# Altium PCB mini驱动V2.PcbDoc
Units mil, origin at the board's own origin, x right, y up, seen from the top; angles counter-clockwise.
Board outline 1710 x 820 mil, 2 copper layers (Top Layer, Bottom Layer); 37 components, 33 nets, 178 pads, 25 vias.
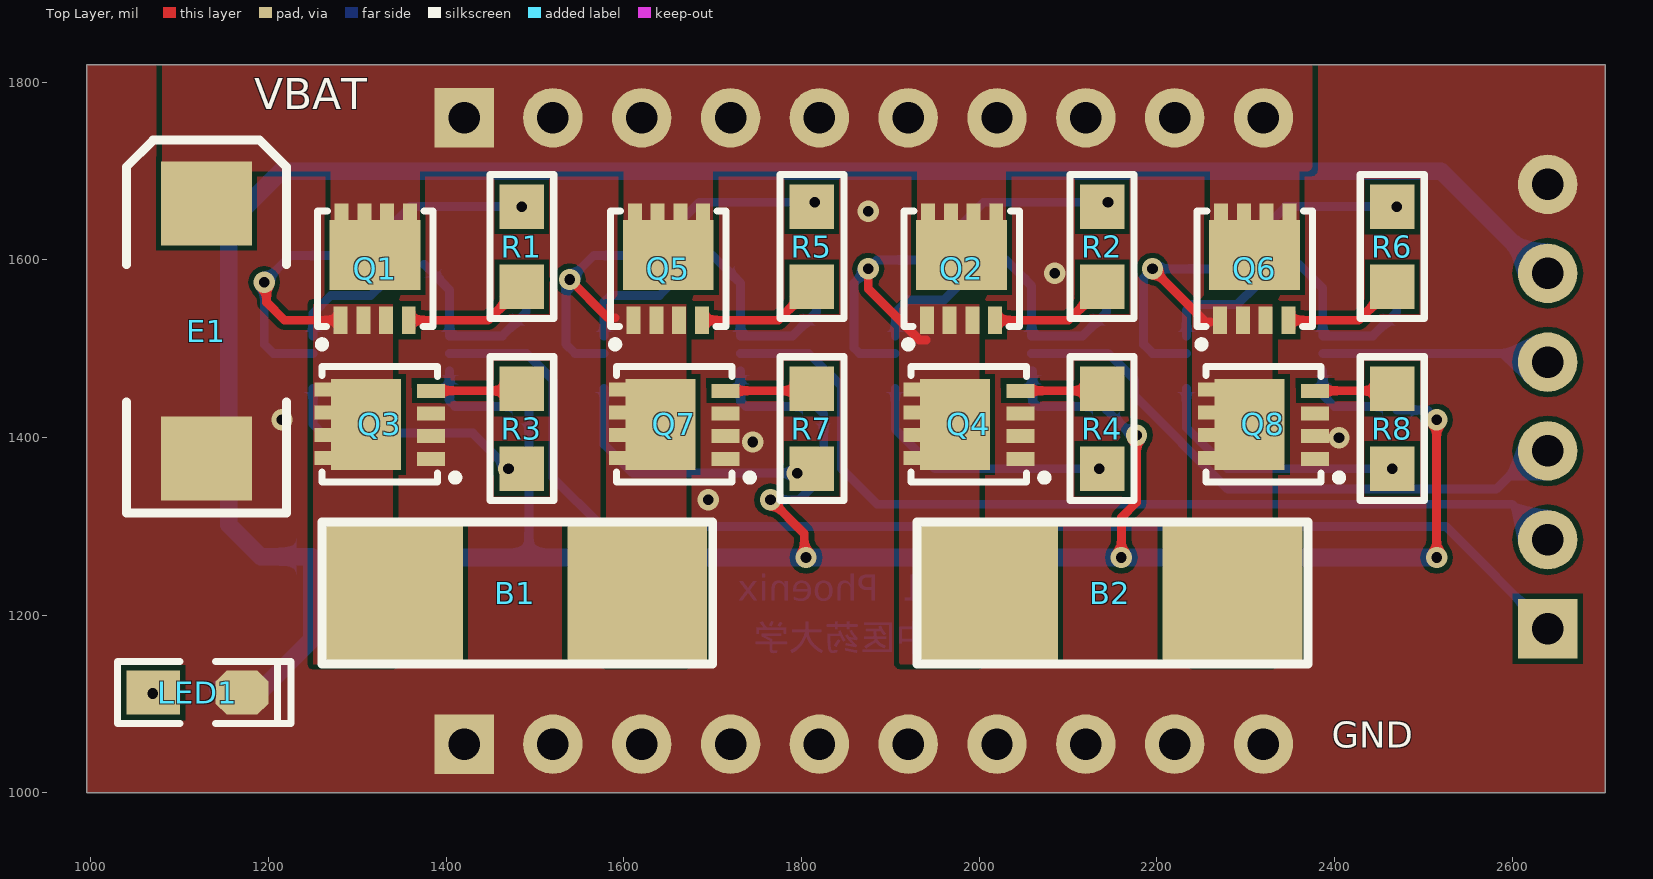
[diagram p0: Top Layer view]
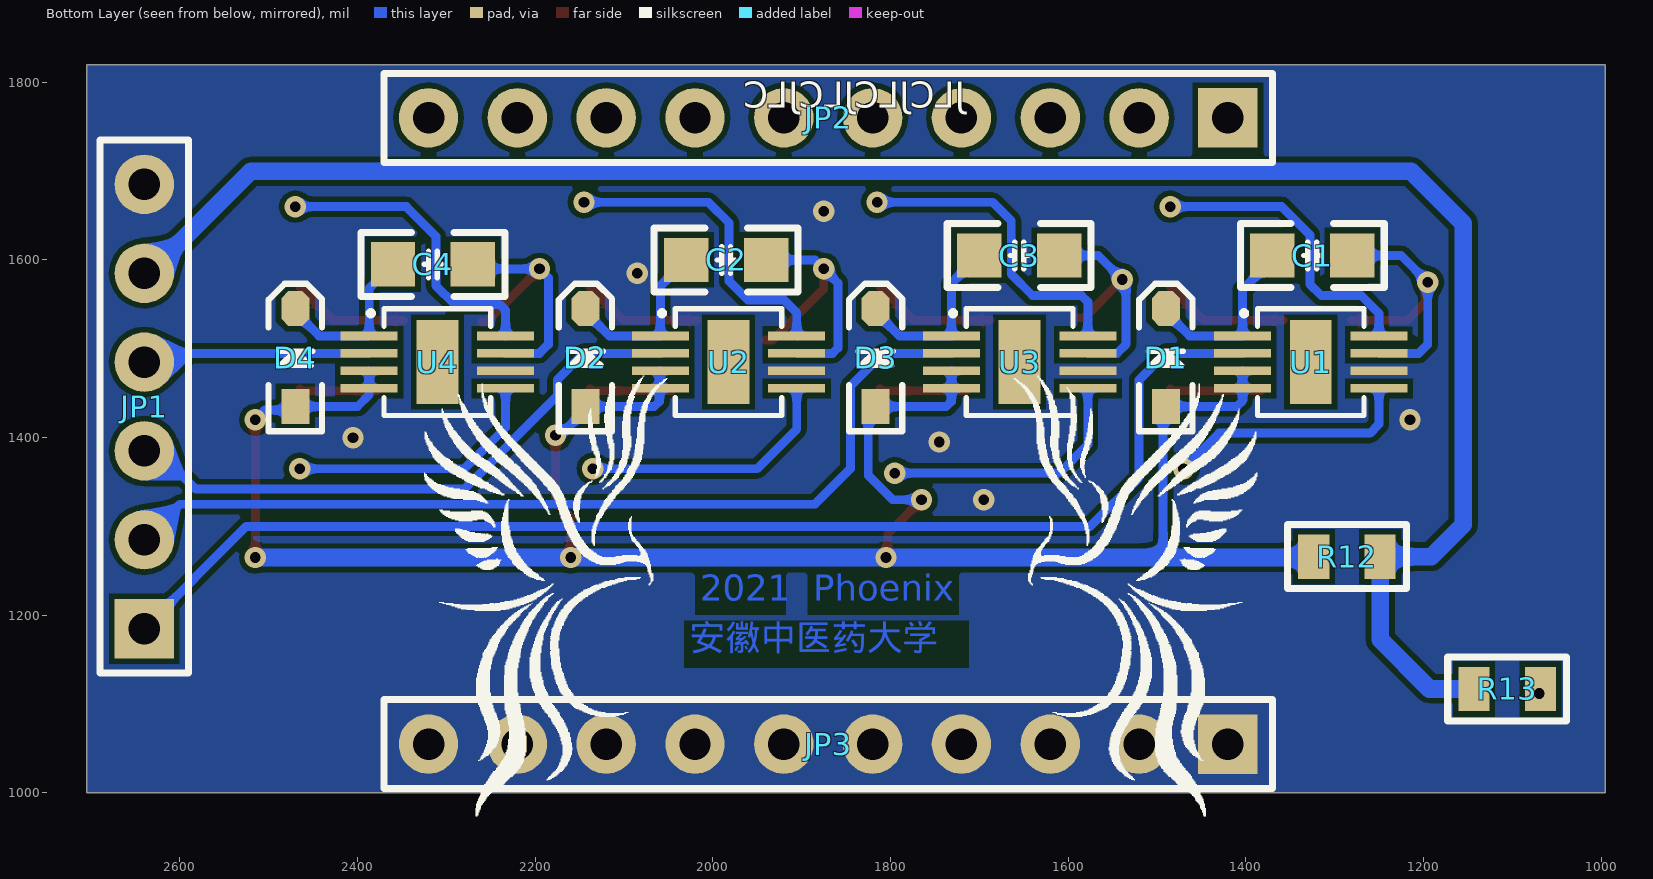
[diagram p1: Bottom Layer view, seen from below]

## Layer stack, top to bottom
Top Solder: solder mask 0.4, Solder Resist, Dk 3.5
Top Layer: signal copper 1.4
Dielectric 1: dielectric 12.6, FR-4, Dk 4.8
Bottom Layer: signal copper 1.4
Bottom Solder: solder mask 0.4, Solder Resist, Dk 3.5

## Board outline
995,1000 2705,1000 2705,1820 995,1820

## Design rules (kind name [scope] priority, off if disabled: settings)
Clearance [All] p1: gap=6 ignorepadtopadclearanceinfootprint=FALSE
HoleSize [All] p1: absolutevalues=TRUE maxlimit=1000 minlimit=1 maxpercent=80.000 minpercent=20.000
MinimumSolderMaskSliver [All] p1: minsoldermaskwidth=0
PlaneConnect [All] p1: planeconnectstyle=Direct reliefexpansion=20 reliefentries=4 reliefconductorwidth=10 reliefairgap=10
PolygonConnect [All] p1: connectstyle=Direct reliefconductorwidth=10 reliefentries=4 polygonreliefangle="90 Angle" airgapwidth=10
RoutingVias [All] p1: holewidth=12 width=24 viastyle="Through Hole" minholewidth=12 minwidth=24 maxholewidth=60 maxwidth=120
SilkToSilkClearance [All] p1: silktosilkclearance=0
SilkToSolderMaskClearance [IsPad] p1: minsilkscreentomaskgap=0 clearancetoexposedcopper=TRUE
SolderMaskExpansion [All] p1: expansion=4
Width [All] p1: maxlimit=500 minlimit=6 preferedwidth=6
25 further rules are at their usual default settings.

## Components (designator, comment, footprint, x,y, rotation, side; value= is the part's Value field where it differs from the comment)
B1 "Motor" 电机 1480,1225 r90 top
B2 "Motor" 电机 2150,1225 r90 top
C1 "1uF" "C 0805_M" 1325,1605 r0 bottom
C2 "1uF" "C 0805_M" 1985,1600 r0 bottom
C3 "1uF" "C 0805_M" 1655,1605 r0 bottom
C4 "1uF" "C 0805_M" 2315,1595 r0 bottom
D1 "B5919WS" SOD-323 1490,1490.12 r90 bottom
D2 "B5919WS" SOD-323 2143.33,1490.12 r90 bottom
D3 "B5919WS" SOD-323 1816.67,1490.12 r90 bottom
D4 "B5919WS" SOD-323 2470,1490.12 r90 bottom
E1 "220uF" "CD D(7343)" 1130,1520 r270 top
JP1 "HDR-1X6" HDR2.54-LI-6P 2640,1435 r90 bottom
JP2 "HDR-1X10" HDR2.54-LI-10P 1870,1760 r0 bottom
JP3 "HDR-1X10" HDR2.54-LI-10P 1870,1055 r0 bottom
LED1 "红色" "LED 0805G" 1120,1113 r0 top
Q1 "AON7418" AON7418 1320,1590 r0 top
Q2 "AON7418" AON7418 1980.12,1590 r0 top
Q3 "AON7418" AON7418 1325,1415 r90 top
Q4 "AON7418" AON7418 1988.33,1415 r90 top
Q5 "AON7418" AON7418 1650.06,1590 r0 top
Q6 "AON7418" AON7418 2310.18,1590 r0 top
Q7 "AON7418" AON7418 1656.67,1415 r90 top
Q8 "AON7418" AON7418 2320,1415 r90 top
R1 "10R" "R 0805_M" 1485,1615 r90 top
R2 "10R" "R 0805_M" 2138.33,1615 r90 top
R3 "10R" "R 0805_M" 1485,1410 r270 top
R4 "10R" "R 0805_M" 2138.33,1410 r270 top
R5 "10R" "R 0805_M" 1811.67,1615 r90 top
R6 "10R" "R 0805_M" 2465,1615 r90 top
R7 "10R" "R 0805_M" 1811.67,1410 r270 top
R8 "10R" "R 0805_M" 2465,1410 r270 top
R12 "0R" "R 0805_L" 1286,1266 r0 bottom
R13 "10K" "R 0805_L" 1105.6,1117 r180 bottom
U1 "FD2204D" FD2204D 1326.77,1485 r270 bottom
U2 "FD2204D" FD2204D 1982.26,1485 r270 bottom
U3 "FD2204D" FD2204D 1654.51,1485 r270 bottom
U4 "FD2204D" FD2204D 2310,1485 r270 bottom

## Footprints (in the part's own frame and the unit in brackets; to place one, negate y for a bottom-side part, rotate by r counter-clockwise, add the part's x,y. Pads: shape width x height; smd on the part's side, far side on the other; paste and mask are expansions set on the pad)
AON7418 [mil]
  rect 15.74x31.5 smd: 1(-39.04,-57.87) 2(-13.45,-57.87) 3(12.14,-57.87) 4(37.73,-57.87) 5(39.04,57.87) 6(13.44,57.87) 7(-12.16,57.87) 8(-37.76,57.87)
  rect 102.36x78.74 smd: 9(-0.18,15.49)
  silkscreen extent -65,-89 65,65, body extent -65,-65 65,65, height 24
"C 0805_M" [mil] "无极性贴片电容                                         淘宝ID:黄晶宝石"
  rect 50x50 smd: 1(-45,0) 2(45,0)
  silkscreen extent -81,-36 81,36, body extent -39,-24 39,24, height 20
"CD D(7343)" [mm] "长7.3mm，宽4.3mm，厚2.8mm      淘宝ID:黄晶宝石"
  rect 2.4x2.6 smd: 1(-3.65,0) 2(3.65,0)
  silkscreen extent -5.46,-2.29 5.21,2.29, body extent -3.65,-2.15 3.65,2.15, height 2.8
FD2204D [mm]
  rect 0.25x1.63 smd: 1(-0.75,-1.95) 2(-0.25,-1.95) 3(0.25,-1.95) 4(0.75,-1.95) 5(0.75,1.95) 6(0.25,1.95) 7(-0.25,1.95) 8(-0.75,1.95)
  rect 2.4x1.2 smd: 9(0,0)
  silkscreen extent -1.52,-1.98 1.52,1.52, body extent -1.52,-1.52 1.52,1.52, height 0.25
HDR2.54-LI-6P [mm] "排针，6脚"
  rect 1.7x1.7 hole 0.9: 1(-6.35,0)
  round 1.7 hole 0.9: 2(-3.81,0) 3(-1.27,0) 4(1.27,0) 5(3.81,0) 6(6.35,0)
  silkscreen extent -7.62,-1.27 7.62,1.27, body extent -7.62,-1.27 7.62,1.27, height 8.5
HDR2.54-LI-10P [mm] "排针，10脚   淘宝ID:黄晶宝石   店铺网址:https://shop463601444.taobao.com"
  rect 1.7x1.7 hole 0.9: 1(-11.43,0)
  round 1.7 hole 0.9: 2(-8.89,0) 3(-6.35,0) 4(-3.81,0) 5(-1.27,0) 6(1.27,0) 7(3.81,0) 8(6.35,0) 9(8.89,0) 10(11.43,0)
  silkscreen extent -12.7,-1.27 12.7,1.27, body extent -12.7,-1.27 12.7,1.27, height 8.5
"LED 0805G" [mil] "绿色0805LED                              淘宝ID:黄晶宝石"
  rect 60x50 smd: 1(-50,0)
  oct 60x50 smd: 2(50,0)
  silkscreen extent -90,-35 105,35, body extent -39,-25 39,25, height 32
"R 0805_L" [mil] "1/8W贴片电阻"
  rect 35x50 smd: 1(-37.4,0) 2(37.4,0)
  silkscreen extent -67,-36 67,36, body extent -39,-25 39,25, height 20
"R 0805_M" [mil] "1/8W贴片电阻"
  rect 50x50 smd: 1(-45,0) 2(45,0)
  silkscreen extent -81,-36 81,36, body extent -39,-25 39,25, height 20
SOD-323 [mm] "1.8x1.3X0.9mm（长宽高，不包括引脚）"
  rect 1x0.8 smd: 1(-1.4,0)
  oct 1x0.8 smd: 2(1.4,0)
  silkscreen extent -2.11,-0.76 2.11,0.76, body extent -1.34,-0.63 1.31,0.67, height 1
电机 [mm]
  rect 4x4 smd paste+0 mask+0.051: 1(0,-3.429) 2(0,3.556)
  silkscreen extent -2.03,-5.59 2.03,5.59

## Part data
B1 B2: library part "Motor Servo", "Servo Motor"
C1 C2 C3 C4: library part C, "贴片电容"
D1 D2 D3 D4: library part 1N5819, "肖特基二极管"
E1: library part CT, "贴片钽电容"
JP1: library part "Header 6", "6P接插件"
JP2 JP3: library part "Header 10", "10P接插件"
LED1: library part LED-SMD, "贴片LED"
R1 R2 R3 R4 R5 R6 R7 R8 R12 R13: library part RES
  R1 R2 R3 R4 R5 R6 R7 R8 R13: =0R

## Via types
v1: diameter 24, hole 12, Top Layer to Bottom Layer, tented both sides, 25 vias

## Nets (pads, with @x,y where several pads share a name; then routed paths per layer and width w, separated by ;. In a path a pad name is that pad's centre, name@x,y a point inside that pad or via, vN(x,y) a via of type N, cw(c..) or ccw(c..) an arc to the next point about the centre after c; other vN are vias at no path point)
5V: JP1.5 R12.1 R13.1 | length 2226.6
  Bottom Layer w20: R13.1 1193,1117 1248.6,1172.6 R12.1 1191,1266 1155,1302 1155,1641 1214,1700 2520,1700 2635,1585 JP1.5
IC: D1.1 D2.1 D3.1 D4.1 R12.2 U1.3 U1.4 U2.3 U2.4 U3.3 U3.4 U4.3 U4.4 | length 2473.4
  Top Layer w10: v1(1765,1330) 1803,1292 1803,1267 v1(1805,1265) ; v1(2160,1265) 2160,1310 2177.02,1327.02 v1(2177.02,1402.68) ; v1(2515,1265) v1(2515,1420)
  Bottom Layer w10: U1.3 U1.4 1403.54,1441.46 1410,1435 D1.1 1493,1432 1493,1265 ; U3.3 U3.4 1731.29,1440.86 1737.14,1435 D3.1 1825,1426.67 1825,1357.47 1797.53,1330 v1(1765,1330) ; U2.3 2059.92,1475.16 2060,1475.08 2060,1440.86 2065.86,1435 D2.1 2143.33,1431.06 2171.72,1402.68 v1(2177.02,1402.68) ; U4.3 U4.4 2386.77,1448.23 2400,1435 D4.1 2470,1431.06 2503.94,1431.06 v1(2515,1420)
  Bottom Layer w20: R12.2@1331,1265 1493,1265 v1(1805,1265) v1(2160,1265) v1(2515,1265)
Motor_In1: JP1.1 U1.2 | length 1429.2
  Bottom Layer w10: U1.2 1490.16,1494.84 1520,1465 1520,1355 1575,1300 2525,1300 JP1.1
Motor_In2: JP1.2 U3.2 | length 1049.9
  Bottom Layer w10: U3.2 1807.82,1494.84 1845,1457.66 1845,1365 1885,1325 2600,1325 JP1.2
Motor_In3: JP1.3 U2.2 | length 672.6
  Bottom Layer w10: U2.2 2145.16,1494.84 2175,1465 2175,1446.99 2279.99,1342 2582,1342 2625,1385 JP1.3
Motor_In4: JP1.4 U4.2 | length 257.3
  Bottom Layer w10: U4.2 2386.85,1494.76 2630.24,1494.76 JP1.4
NetB1_1: B1.1 C3.1 Q5.1 Q5.2 Q5.3 Q7.5 Q7.6 Q7.7 Q7.8 Q7.9 U3.7 | length 273.1
  Top Layer w10: v1(1539,1578) 1582,1535 1590,1535
  Bottom Layer w10: U3.7 1544.87,1494.84 1534.66,1505.05 1534.66,1573.66 v1(1539,1578) 1566,1605 C3.1
NetB1_2: B1.2 C1.1 Q1.1 Q1.2 Q1.3 Q3.5 Q3.6 Q3.7 Q3.8 Q3.9 U1.7 | length 342.1
  Top Layer w10: v1(1195,1575) 1197.68,1572.32 1197.68,1552.32 1217.87,1532.13 Q1.1
  Bottom Layer w10: U1.7 1205.16,1494.84 1195,1505 v1(1195,1575) 1225,1605 C1.1
NetB2_1: B2.1 C4.1 Q6.1 Q6.2 Q6.3 Q8.5 Q8.6 Q8.7 Q8.8 Q8.9 U4.7 | length 308.5
  Top Layer w10: v1(2195,1590) 2255,1530 2260,1530
  Bottom Layer w10: U4.7 2195.16,1494.84 2185,1505 2185,1580 v1(2195,1590) 2265,1590 C4.1
NetB2_2: B2.2 C2.1 Q2.1 Q2.2 Q2.3 Q4.5 Q4.6 Q4.7 Q4.8 Q4.9 U2.7 | length 325.1
  Top Layer w10: v1(1875,1590) 1875,1567.52 1932.52,1510 1940,1510
  Bottom Layer w10: U2.7 1865.16,1494.84 1859,1501 1859,1574 v1(1875,1590) 1885,1600 C2.1
NetC1_2: C1.2 D1.2 U1.1 | length 193.8
  Bottom Layer w10: C1.2@1375,1595 1403.54,1566.46 U1.1 1463.23,1514.53 1490,1541.3 D1.2
NetC2_2: C2.2 D2.2 U2.1 | length 196.8
  Bottom Layer w10: C2.2 2059.03,1570.97 U2.1 2116.56,1514.53 2143.33,1541.3 D2.2
NetC3_2: C3.2 D3.2 U3.1 | length 203.8
  Bottom Layer w10: C3.2 1731.29,1573.71 U3.1 1789.9,1514.53 1816.67,1541.3 D3.2
NetC4_2: C4.2 D4.2 U4.1 | length 189.8
  Bottom Layer w10: C4.2 2386.77,1568.23 U4.1 2443.23,1514.53 2470,1541.3 D4.2
NetLED1_1: LED1.1 R13.2
  other v1: 1069.6,1112
NetQ1_4: Q1.4 R1.1 | length 143
  Top Layer w10: Q1.4 1447.13,1532.13 R1.1
NetQ2_4: Q2.4 R2.1 | length 136.2
  Top Layer w10: Q2.4 2100.46,1532.13 R2.1
NetQ3_4: Q3.4 R3.1 | length 103.1
  Top Layer w10: Q3.4 1482.73,1452.73 R3.1
NetQ4_4: Q4.4 R4.1 | length 93.1
  Top Layer w10: Q4.4 2136.06,1452.73 R4.1
NetQ5_4: Q5.4 R5.1 | length 139.6
  Top Layer w10: Q5.4 1773.8,1532.13 R5.1
NetQ6_4: Q6.4 R6.1 | length 132.8
  Top Layer w10: Q6.4 2427.13,1532.13 R6.1
NetQ7_4: Q7.4 R7.1 | length 98.1
  Top Layer w10: Q7.4 1809.4,1452.73 R7.1
NetQ8_4: Q8.4 R8.1 | length 88.1
  Top Layer w10: Q8.4 2462.73,1452.73 R8.1
NetR1_2: R1.2 U1.8 | length 342.7
  Bottom Layer w10: U1.8 1250,1540 1270,1560 1315,1560 1327.72,1572.72 1327.72,1628.28 1359.44,1660 v1(1485,1660)
NetR2_2: R2.2 U2.8 | length 355.4
  Bottom Layer w10: U2.8 1905.49,1540.49 1920,1555 1960.56,1555 1981.64,1576.08 1981.64,1641.64 2005,1665 v1(2145,1665)
NetR3_2: R3.2 U1.5 | length 281.2
  Bottom Layer w10: U1.5 1250,1415 1260,1405 1430,1405 v1(1470,1365)
NetR4_2: R4.2 U2.5 | length 293.9
  Bottom Layer w10: U2.5 1905.49,1409.51 1950,1365 v1(2135,1365)
NetR5_2: R5.2 U3.8 | length 357.1
  Bottom Layer w10: U3.8 1577.74,1552.74 1585,1560 1640,1560 1664,1584 1664,1644 1685,1665 v1(1815,1665)
NetR6_2: R6.2 U4.8 | length 346.4
  Bottom Layer w10: U4.8 2233.23,1543.23 2240,1550 2290.56,1550 2311.64,1571.08 2311.64,1626.64 2345,1660 v1(2470,1660)
NetR7_2: R7.2 U3.5 | length 293.8
  Bottom Layer w10: U3.5 1577.74,1392.26 1610,1360 v1(1795,1360)
NetR8_2: R8.2 U4.5 | length 295.1
  Bottom Layer w10: U4.5 2233.23,1411.39 2279.62,1365 v1(2465,1365)
PGND: E1.2 JP1.6 JP3.1 JP3.2 JP3.3 JP3.4 JP3.5 JP3.6 JP3.7 JP3.8 JP3.9 JP3.10 LED1.2 Q3.1 Q3.2 Q3.3 Q4.1 Q4.2 Q4.3 Q7.1 Q7.2 Q7.3 Q8.1 Q8.2 Q8.3 U1.6 U2.6 U3.6 U4.6
  other v1: 1695,1330 1745,1395 2405,1400 1215,1420 2085,1585 1875,1655
VBAT: E1.1 JP2.1 JP2.2 JP2.3 JP2.4 JP2.5 JP2.6 JP2.7 JP2.8 JP2.9 JP2.10 Q1.5 Q1.6 Q1.7 Q1.8 Q1.9 Q2.5 Q2.6 Q2.7 Q2.8 Q2.9 Q5.5 Q5.6 Q5.7 Q5.8 Q5.9 Q6.5 Q6.6 Q6.7 Q6.8 Q6.9
pads on no net: U1.9 U2.9 U3.9 U4.9

## Polygon pours and split planes (outlines as drawn)
PGND on Top Layer "Top Layer-PGND 1" (solid, pour order 26): 995,1000 2705,1000 2705,1820 995,1820
PGND on Top Layer "Top Layer-PGND" (solid, pour order 20): 995,1000 2705,1000 2705,1820 995,1820
NetB2_2 on Top Layer "Top Layer-NetB2_2" (solid, pour order 16): 1910,1550 1910,1145 2000,1145 2000,1550
NetB2_1 on Top Layer "Top Layer-NetB2_1" (solid, pour order 18): 2240,1550 2240,1145 2330,1145 2330,1550
NetB1_1 on Top Layer "Top Layer-NetB1_1" (solid, pour order 14): 1580,1550 1580,1145 1670,1145 1670,1550
NetB1_2 on Top Layer "Top Layer-NetB1_2" (solid, pour order 10): 1250,1550 1250,1145 1340,1145 1340,1550
VBAT on Top Layer "Top Layer-VBAT" (solid, pour order 8): 2260,1575 2360,1575 2360,1765 2265,1765 2260,1770
VBAT on Top Layer "Top Layer-VBAT 1" (solid, pour order 6): 1930,1575 2030,1575 2030,1765 1935,1765 1930,1770
VBAT on Top Layer "Top Layer-VBAT 2" (solid, pour order 4): 1600,1570 1700,1570 1700,1760 1605,1760 1600,1765
VBAT on Top Layer "Top Layer-VBAT 3" (solid, pour order 2): 1270,1570 1370,1570 1370,1760 1275,1760 1270,1765
VBAT on Top Layer "Top Layer-VBAT 4" (solid, pour order 0): 1080,1820 1080,1700 2375,1700 2375,1820
PGND on Bottom Layer "Bottom Layer-PGND" (solid, pour order 28): 995,1000 2705,1000 2705,1820 995,1820

## Other copper
Bottom Layer:
  text "Phoenix" at 1887,1207 h50
  text "2021" at 2014,1206.86 h50
  text "安徽中医药大学" at 2026,1151 h50

## Silkscreen, mask and mechanical layers (free items; w line width, h text height)
Top Overlay:
  text "VBAT" at 1184,1758 h60
  text "GND" at 2397,1041 h50
Bottom Overlay:
  drawing of 4320 lines, arcs and shapes, not listed
  text "JLCJLCJLCJLC" at 1716,1762 h50
Bottom Solder:
  text "Phoenix" at 1887,1207 h50
  text "2021" at 2014,1206.86 h50
  text "安徽中医药大学" at 2026,1151 h50
Mechanical 1:
  the board outline again, w10